# EAGLE board test (EAGLE 6.6.0)

No outline drawn. Coordinates in mm, seen from the top.
Copper layers (1*16): Top 0.035mm / dielectric 1.5mm / Bottom 0.035mm
Design rules "default": minimum track width 10mil, minimum drill 24mil, track to track 8mil, track to pad 8mil, pad to pad 8mil, via to via 8mil, smd to smd 8mil, copper to edge 40mil, drill to drill 8mil, minimum pad ring 10mil, minimum via ring 8mil, stop-mask expansion 4mil, vias tented up to drill 0mil, thermal gap 10mil

## Footprints (pad centres in the part's own frame; a part is rotated, then mirrored left to right if it is on the bottom)
RJ-45_7810-8P8C = drill 0.8 square: 1 -3.5,2.3 | drill 0.8: 2 -2.5,4.84; 3 -1.5,2.3; 4 -0.5,4.84; 5 0.5,2.3; 6 1.5,4.84; 7 2.5,2.3; 8 3.5,4.84 | drill 1.5 square: P$1 -8.125,4.84; P$2 8.125,4.84 | hole 2.6: -7.4,0; 7.4,0

## Placement (x,y rotation side)
E$1  [RJ-45_7810-8P8C]  8.89,6.35 0 top

## Library data of the parts
E$1 = Connector-etc